# Altium PCB Displaying_Unit_Pcb.PcbDoc
Units mm, origin at the board's own origin, x right, y up, seen from the top; angles counter-clockwise.
Board outline 178.44 x 153.42 mm, 2 copper layers (Top Layer, Bottom Layer); 73 components, 81 nets, 257 pads, 30 vias.
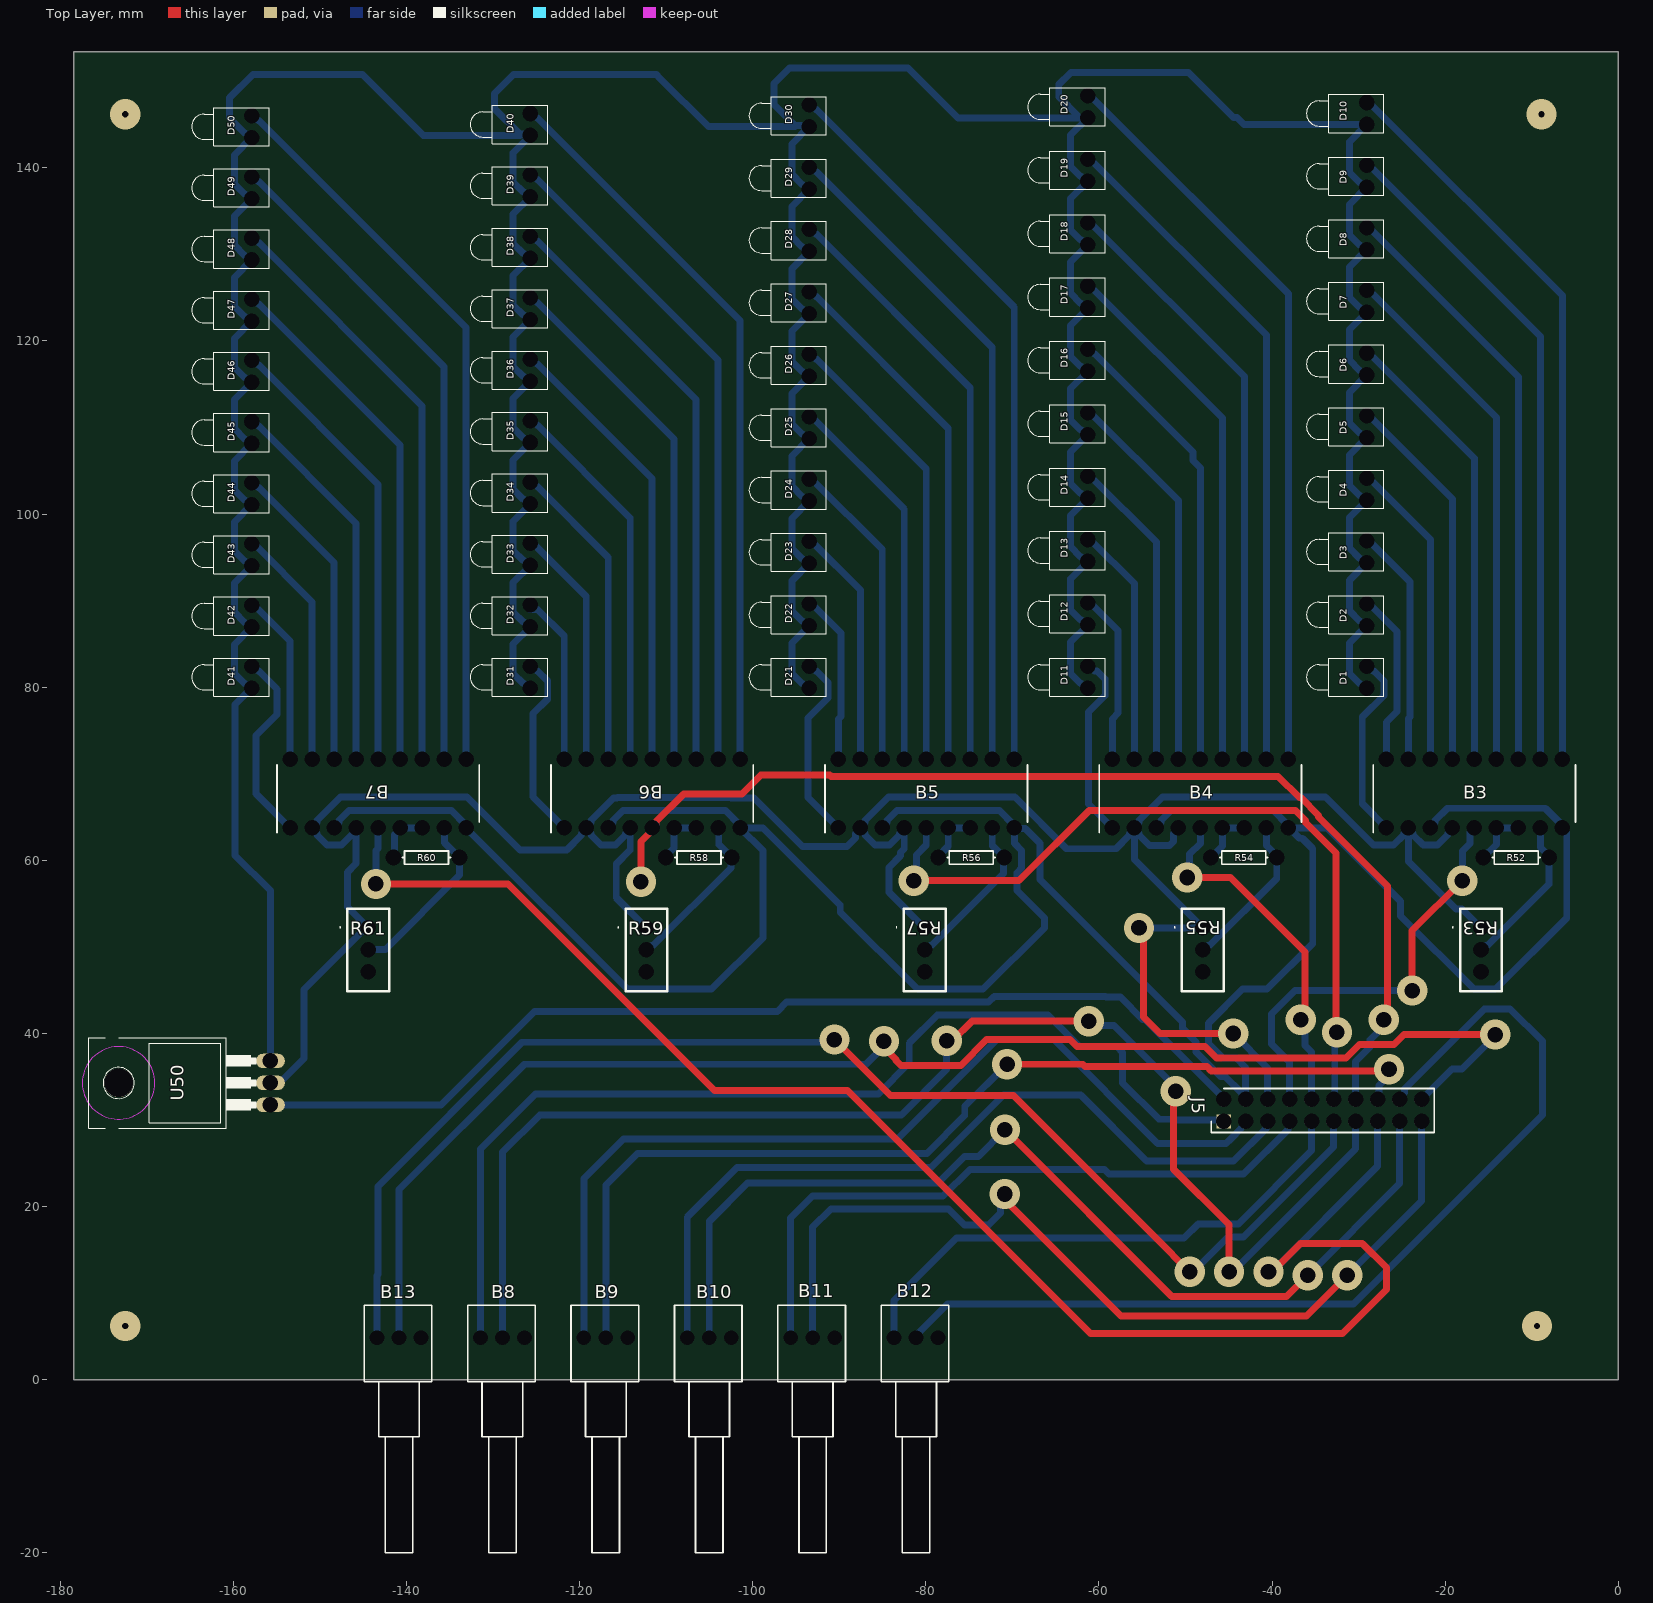
[diagram p0: Top Layer view]
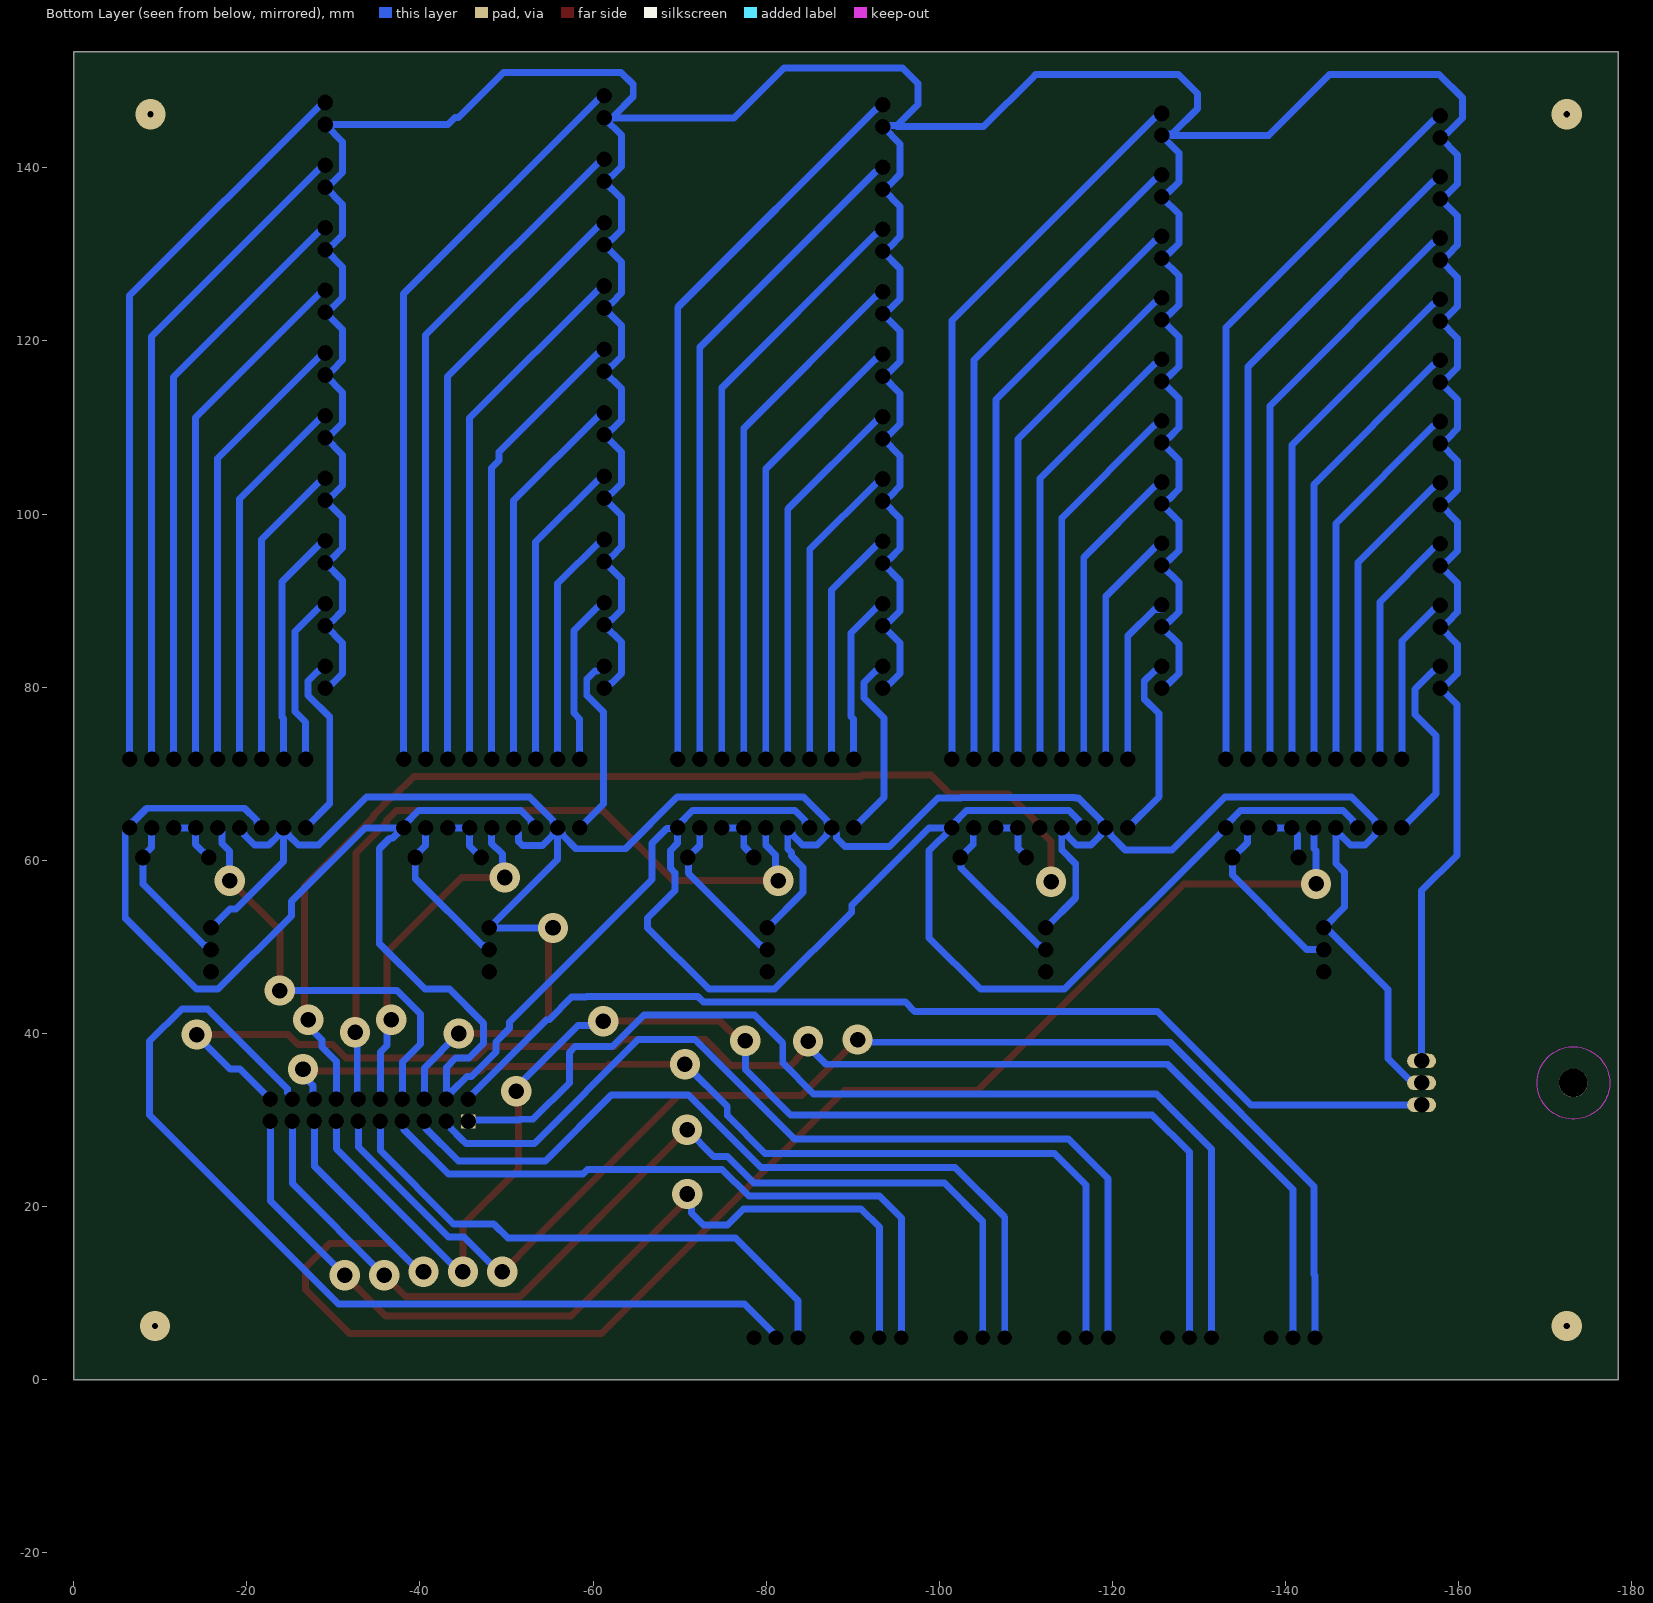
[diagram p1: Bottom Layer view, seen from below]

## Layer stack, top to bottom
Top Solder: solder mask 0.0102, Solder Resist, Dk 3.5
Top Layer: signal copper 0.0356
Dielectric 1: dielectric 0.32, FR-4, Dk 4.8
Bottom Layer: signal copper 0.0356
Bottom Solder: solder mask 0.0102, Solder Resist, Dk 3.5

## Board outline
-178.435,0 0,0 0,153.416 -105.537,153.416 -178.435,153.416

## Design rules (kind name [scope] priority, off if disabled: settings)
Clearance [All] p1: gap=0.7 ignorepadtopadclearanceinfootprint=FALSE except(0: Arc-Hole Track-Hole SMDPad-Hole THPad-Hole Via-Hole Fill-Hole Poly-Hole Region-Hole Text-Hole)
PolygonConnect [All] p1: connectstyle=Relief reliefconductorwidth=0.254 reliefentries=4 polygonreliefangle="90 Angle" airgapwidth=0.254
RoutingVias [All] p1: holewidth=0.711 width=1.27 viastyle="Through Hole" minholewidth=0.711 minwidth=1.27 maxholewidth=0.711 maxwidth=1.27
SolderMaskExpansion [All] p1: expansion=0.102 istentingtop=FALSE
Width [All] p1: maxlimit=0.8 minlimit=0.8 preferedwidth=0.8 minimp=50.000000 maximp=50.000000 favimp=50.000000
30 further rules are at their usual default settings.

## Components (designator, comment, footprint, x,y, rotation, side; value= is the part's Value field where it differs from the comment)
B3 "LM3915N-1_NOPB" DIP794W56P254L2286H533Q18N -16.637,67.723 r90 top
B4 "LM3915N-1_NOPB" DIP794W56P254L2286H533Q18N -48.292,67.723 r90 top
B5 "LM3915N-1_NOPB" DIP794W56P254L2286H533Q18N -79.947,67.723 r90 top
B6 "LM3915N-1_NOPB" DIP794W56P254L2286H533Q18N -111.601,67.723 r90 top
B7 "LM3915N-1_NOPB" DIP794W56P254L2286H533Q18N -143.256,67.723 r90 top
B8 "14910A0BHSX10502KA" 14910F0GJSX10103KA -128.9,-6.571 r270 top
B9 "14910A0BHSX10502KA" 14910F0GJSX10103KA -116.957,-6.571 r270 top
B10 "14910A0BHSX10502KA" 14910F0GJSX10103KA -105.014,-6.571 r270 top
B11 "14910A0BHSX10502KA" 14910F0GJSX10103KA -93.071,-6.571 r270 top
B12 "14910A0BHSX10502KA" 14910F0GJSX10103KA -81.128,-6.571 r270 top
B13 "14910A0BHSX10502KA" 14910F0GJSX10103KA -140.843,-6.571 r270 top
D1 "LED1" LED-1 -29.083,81.153 r180 top
D2 "LED1" LED-1 -29.083,88.388 r180 top
D3 "LED1" LED-1 -29.083,95.623 r180 top
D4 "LED1" LED-1 -29.083,102.858 r180 top
D5 "LED1" LED-1 -29.083,110.093 r180 top
D6 "LED1" LED-1 -29.083,117.327 r180 top
D7 "LED1" LED-1 -29.083,124.562 r180 top
D8 "LED1" LED-1 -29.083,131.797 r180 top
D9 "LED1" LED-1 -29.083,139.032 r180 top
D10 "LED1" LED-1 -29.083,146.267 r180 top
D11 "LED1" LED-1 -61.277,81.153 r180 top
D12 "LED1" LED-1 -61.277,88.473 r180 top
D13 "LED1" LED-1 -61.277,95.792 r180 top
D14 "LED1" LED-1 -61.277,103.112 r180 top
D15 "LED1" LED-1 -61.277,110.431 r180 top
D16 "LED1" LED-1 -61.277,117.751 r180 top
D17 "LED1" LED-1 -61.277,125.07 r180 top
D18 "LED1" LED-1 -61.277,132.39 r180 top
D19 "LED1" LED-1 -61.277,139.709 r180 top
D20 "LED1" LED-1 -61.277,147.029 r180 top
D21 "LED1" LED-1 -93.472,81.153 r180 top
D22 "LED1" LED-1 -93.472,88.36 r180 top
D23 "LED1" LED-1 -93.472,95.566 r180 top
D24 "LED1" LED-1 -93.472,102.773 r180 top
D25 "LED1" LED-1 -93.472,109.98 r180 top
D26 "LED1" LED-1 -93.472,117.186 r180 top
D27 "LED1" LED-1 -93.472,124.393 r180 top
D28 "LED1" LED-1 -93.472,131.6 r180 top
D29 "LED1" LED-1 -93.472,138.806 r180 top
D30 "LED1" LED-1 -93.472,146.013 r180 top
D31 "LED1" LED-1 -125.666,81.153 r180 top
D32 "LED1" LED-1 -125.666,88.247 r180 top
D33 "LED1" LED-1 -125.666,95.341 r180 top
D34 "LED1" LED-1 -125.666,102.434 r180 top
D35 "LED1" LED-1 -125.666,109.528 r180 top
D36 "LED1" LED-1 -125.666,116.622 r180 top
D37 "LED1" LED-1 -125.666,123.716 r180 top
D38 "LED1" LED-1 -125.666,130.809 r180 top
D39 "LED1" LED-1 -125.666,137.903 r180 top
D40 "LED1" LED-1 -125.666,144.997 r180 top
D41 "LED1" LED-1 -157.861,81.153 r180 top
D42 "LED1" LED-1 -157.861,88.219 r180 top
D43 "LED1" LED-1 -157.861,95.284 r180 top
D44 "LED1" LED-1 -157.861,102.35 r180 top
D45 "LED1" LED-1 -157.861,109.415 r180 top
D46 "LED1" LED-1 -157.861,116.481 r180 top
D47 "LED1" LED-1 -157.861,123.546 r180 top
D48 "LED1" LED-1 -157.861,130.612 r180 top
D49 "LED1" LED-1 -157.861,137.677 r180 top
D50 "LED1" LED-1 -157.861,144.743 r180 top
J5 "M20-9761042" HDRV20W64P254_2X10_2540X508X838P -45.593,29.845 r0 top
R52 "Res1" AXIAL-0.3 -11.811,60.325 r180 top value=1K
R53 "3296W-1-501LF" 3296W1501LF -15.875,52.197 r180 top
R54 "Res1" AXIAL-0.3 -43.275,60.325 r180 top value=1K
R55 "3296W-1-501LF" 3296W1501LF -48.006,52.197 r180 top
R56 "Res1" AXIAL-0.3 -74.74,60.325 r180 top value=1K
R57 "3296W-1-501LF" 3296W1501LF -80.137,52.197 r180 top
R58 "Res1" AXIAL-0.3 -106.204,60.325 r180 top value=1K
R59 "3296W-1-501LF" 3296W1501LF -112.268,52.197 r180 top
R60 "Res1" AXIAL-0.3 -137.668,60.325 r180 top value=1K
R61 "3296W-1-501LF" 3296W1501LF -144.399,52.197 r180 top
U50 "LM7805" TO220 -162.052,34.29 r90 top

## Footprints (in the part's own frame and the unit in brackets; to place one, negate y for a bottom-side part, rotate by r counter-clockwise, add the part's x,y. Pads: shape width x height; smd on the part's side, far side on the other; paste and mask are expansions set on the pad)
3296W1501LF [mm]
  round 1.217 hole 1.8: 1(0,0) 2(0,2.54) 3(0,5.08)
  silkscreen extent -2.42,-2.22 3.3,7.3, body extent -10,-3.38 10,3.38, height 5.8
14910F0GJSX10103KA [mm]
  round 1.37 hole 1.7: 1(-11.42,-2.54) 2(-11.42,0) 3(-11.42,2.54)
  silkscreen extent -15.18,-4.02 13.39,3.79, body extent -10,-3.38 10,3.38, height 5.8
AXIAL-0.3 [mm] "Axial Device, Thru-Hole; 2 Leads; 0.3 in Pin Spacing"
  round 1.4 hole 1.8: 1(-3.81,0) 2(3.81,0)
  silkscreen extent -2.77,-0.76 2.77,0.76
DIP794W56P254L2286H533Q18N [mm]
  rect 1.159x1.159 / inner round 1.159 / far side rect 1.159x1.159 hole 1.8: 1(-3.969,10.16)
  round 1.159 hole 1.8: 2(-3.969,7.62) 3(-3.969,5.08) 4(-3.969,2.54) 5(-3.969,0) 6(-3.969,-2.54) 7(-3.969,-5.08) 8(-3.969,-7.62) 9(-3.969,-10.16) 10(3.969,-10.16) 11(3.969,-7.62) 12(3.969,-5.08) 13(3.969,-2.54) 14(3.969,0) 15(3.969,2.54) 16(3.969,5.08) 17(3.969,7.62) 18(3.969,10.16)
  silkscreen extent -4.55,-11.68 3.3,11.68
HDRV20W64P254_2X10_2540X508X838P [mm]
  rect 1.65x1.65 / inner round 1.65 / far side rect 1.65x1.65 hole 1.8: 1(0,0)
  round 1.65 hole 1.8: 2(0,2.54) 3(2.54,0) 4(2.54,2.54) 5(5.08,0) 6(5.08,2.54) 7(7.62,0) 8(7.62,2.54) 9(10.16,0) 10(10.16,2.54) 11(12.7,0) 12(12.7,2.54) 13(15.24,0) 14(15.24,2.54) 15(17.78,0) 16(17.78,2.54) 17(20.32,0) 18(20.32,2.54) 19(22.86,0) 20(22.86,2.54)
  silkscreen extent -1.45,-1.27 24.31,3.81, body extent -1.27,-1.27 24.13,3.81, height 8.38
LED-1 [mm] "LED; 2 Leads"
  round 1.6 hole 1.8: 1(0,1.27) 2(0,-1.27)
  silkscreen extent -2,-2.2 6.95,2.2
TO220 [mil]
  oval 66x132 hole 70.87: 1(-100,-250) 2(0,-250) 3(100,-250)
  round 130 hole 130 unplated: ""(0,440)
  Keep-Out Layer circle w0: c0,440 r165
  Keep-Out Layer circle w0: c0,440 r165
  silkscreen extent -205,-185 205,575

## Part data
B3 B4 B5 B6 B7: "Logarithmic bargraph driver,LM3915N-1 Texas Instruments LM3915N-1/NOPB, LED Driver, 10-Digits 10-Segments, 3.3 V, 5 V, 9 V, 12 V, 15 V, 18 V, 24 V, 18-Pin", Manufacturer_Name="Texas Instruments", Manufacturer_Part_Number=LM3915N-1/NOPB, Mouser Part Number=926-LM3915N-1/NOPB, Datasheet Link=http://media.digikey.com/pdf/Data%20Sheets/Texas%20Instruments%20PDFs/LM3915.pdf, Geometry.Height=5.334mm, Mouser Price/Stock=https://www.mouser.co.uk/ProductDetail/Texas-Instruments/LM3915N-1-NOPB?qs=QbsRYf82W3Fo14xSwohWxQ%3D%3D
B8 B9 B10 B11 B12 B13: "Potentiometers 1/2' SQ 1/4'S 5Kohms Cermet", Manufacturer_Name=Vishay, Mouser Part Number=594-14910A0BHSP502KA, Datasheet Link=https://www.mouser.com/datasheet/2/427/148149-239924.pdf, Manufacturer_Part_Number=14910A0BHSX10502KA, Mouser Price/Stock=https://www.mouser.co.uk/ProductDetail/Vishay-Spectrol/14910A0BHSX10502KA?qs=sKxHajcpPaBuEjDBnLxOZg%3D%3D
D1 D2 D3 D4 D5 D6 D7 D8 D9 D10 D11 D12 D13 D14 D15 D16 D17 D18 D19 D20 D21 D22 D23 D24 D25 D26 D27 D28 D29 D30 D31 D32 D33 D34 D35 D36 D37 D38 D39 D40 D41 D42 D43 D44 D45 D46 D47 D48 D49 D50: "Typical RED GaAs LED", LatestRevisionDate=08-Jul-2005, LatestRevisionNote="Mech Layer 1 removed.", PackageDescription="LED; 2 Leads", PackageReference=LED-1, Published=8-Jun-2000, Publisher="Altium Limited"
J5: "Headers & Wire Housings 10+10 DIL VERTICAL PIN HEADER GOLD+TIN", Manufacturer_Name=Harwin, Mouser Part Number=855-M20-9761042, Datasheet Link=https://cdn.harwin.com/pdfs/M20-976.pdf, Geometry.Height=8.38mm, Manufacturer_Part_Number=M20-9761042, Mouser Price/Stock=https://www.mouser.co.uk/ProductDetail/Harwin/M20-9761042?qs=vF78I%252BjhbY%2Fp44UYNx369Q%3D%3D
R52 R54 R56 R58 R60: "Resistor", LatestRevisionDate=17-Jul-2002, LatestRevisionNote="Re-released for DXP Platform.", PackageDescription="Axial Device, Thru-Hole; 2 Leads; 0.3 in Pin Spacing", PackageReference=AXIAL-0.3, Published=8-Jun-2000, Publisher="Altium Limited"
R53 R55 R57 R59 R61: "Trimmer Resistors - Through Hole 3/8IN 500 OHM Sealed Vertical Adjust", Manufacturer_Name=Bourns, Mouser Part Number=652-3296W-1-501LF, Arrow Part Number=3296W-1-501LF, Arrow Price/Stock=https://www.arrow.com/en/products/3296w-1-501lf/bourns?region=europe, Datasheet Link=https://datasheet.datasheetarchive.com/originals/dk/DKDS-12/224533.pdf, Geometry.Height=11.8mm, Manufacturer_Part_Number=3296W-1-501LF, Mouser Price/Stock=https://www.mouser.co.uk/ProductDetail/Bourns/3296W-1-501LF?qs=jv1NtkgVBglZfwkzTzmOUg%3D%3D
U50: "Linear Voltage Regulator IC Positive Fixed 1 Output 1.5A DDPAK/TO-263-3", Package=None, Availability="In Stock", Check_prices=https://www.snapeda.com/parts/LM7805/Texas+Instruments/view-part/?ref=eda, MF="Texas Instruments", MP=LM7805, Price=None, Purchase-URL=https://pricing.snapeda.com/search/part/LM7805/?ref=eda, SnapEDA_Link=https://www.snapeda.com/parts/LM7805/Texas+Instruments/view-part/?ref=snap

## Via types
v1: diameter 3.5, hole 1.8, Top Layer to Bottom Layer, 26 vias
v2: diameter 3.5, hole 0.711, Top Layer to Bottom Layer, 4 vias

## Nets (pads, with @x,y where several pads share a name; then routed paths per layer and width w, separated by ;. In a path a pad name is that pad's centre, name@x,y a point inside that pad or via, vN(x,y) a via of type N, cw(c..) or ccw(c..) an arc to the next point about the centre after c; other vN are vias at no path point)
B1L1: B3.1 D1.2 | length 21.9
  Bottom Layer w0.8: D1.2 -28.867,82.423 -28.327,81.883 -28.255,81.883 -27.083,80.711 -27.083,79.055 -29.591,76.547 -29.591,66.548 B3.1
B1L2: B3.18 D2.2 | length 20.1
  Bottom Layer w0.8: D2.2 -28.93,89.505 -28.641,89.505 -25.583,86.446 -25.583,77.168 -26.797,75.954 B3.18
B1L3: B3.17 D3.2 | length 27.5
  Bottom Layer w0.8: D3.2 -28.93,96.74 -28.641,96.74 -24.083,92.181 -24.083,76.547 -24.257,76.373 B3.17
B1L4: B3.16 D4.2 | length 35.7
  Bottom Layer w0.8: D4.2 -28.93,103.975 -28.641,103.975 -21.717,97.05 B3.16
B1L5: B3.15 D5.2 | length 43.9
  Bottom Layer w0.8: D5.2 -28.93,111.209 -28.641,111.209 -19.177,101.745 B3.15
B1L6: B3.14 D6.2 | length 52.2
  Bottom Layer w0.8: D6.2 -28.93,118.444 -28.641,118.444 -16.637,106.44 B3.14
B1L7: B3.13 D7.2 | length 60.5
  Bottom Layer w0.8: D7.2 -28.93,125.679 -28.641,125.679 -14.097,111.135 B3.13
B1L8: B3.12 D8.2 | length 68.8
  Bottom Layer w0.8: D8.2 -28.93,132.914 -28.641,132.914 -11.557,115.83 B3.12
B1L9: B3.11 D9.2 | length 77.1
  Bottom Layer w0.8: D9.2 -28.93,140.149 -28.641,140.149 -9.017,120.524 B3.11
B1L10: B3.10 D10.2 | length 85.4
  Bottom Layer w0.8: D10.2 -28.93,147.384 -28.641,147.384 -6.477,125.219 B3.10
B2L1: B4.1 D11.2 | length 21.7
  Bottom Layer w0.8: D11.2 -61.061,82.423 -60.521,81.883 -60.222,81.883 -59.278,80.938 -59.278,79.055 -61.214,77.118 -61.214,66.516 B4.1
B2L2: B4.18 D12.2 | length 19.9
  Bottom Layer w0.8: D12.2 -61.124,89.589 -60.836,89.589 -57.778,86.531 -57.778,77.012 -58.452,76.337 B4.18
B2L3: B4.17 D13.2 | length 27.8
  Bottom Layer w0.8: D13.2 -61.124,96.909 -60.836,96.909 -55.912,91.985 B4.17
B2L4: B4.16 D14.2 | length 36.1
  Bottom Layer w0.8: D14.2 -61.124,104.229 -60.836,104.229 -53.372,96.764 B4.16
B2L5: B4.15 D15.2 | length 44.5
  Bottom Layer w0.8: D15.2 -61.124,111.548 -60.836,111.548 -50.832,101.544 B4.15
B2L6: B4.14 D16.2 | length 52.9
  Bottom Layer w0.8: D16.2 -61.061,119.021 -60.521,118.481 -60.449,118.481 -49.149,107.181 -49.149,106.172 -48.292,105.315 B4.14
B2L7: B4.13 D17.2 | length 61.2
  Bottom Layer w0.8: D17.2 -61.124,126.187 -60.836,126.187 -45.752,111.103 B4.13
B2L8: B4.12 D18.2 | length 69.6
  Bottom Layer w0.8: D18.2 -61.124,133.507 -60.836,133.507 -43.212,115.883 B4.12
B2L9: B4.11 D19.2 | length 78
  Bottom Layer w0.8: D19.2 -61.124,140.826 -60.836,140.826 -40.672,120.662 B4.11
B2L10: B4.10 D20.2 | length 86.4
  Bottom Layer w0.8: D20.2 -61.124,148.146 -60.836,148.146 -38.132,125.442 B4.10
B3L1: B5.1 D21.2 | length 22.1
  Bottom Layer w0.8: D21.2 -93.256,82.423 -92.716,81.883 -92.644,81.883 -91.313,80.552 -91.313,78.74 -93.599,76.454 -93.599,67.246 B5.1
B3L2: B5.18 D22.2 | length 19.7
  Bottom Layer w0.8: D22.2 -93.319,89.477 -93.03,89.477 -89.813,86.259 -89.813,76.628 -90.106,76.335 B5.18
B3L3: B5.17 D23.2 | length 27.8
  Bottom Layer w0.8: D23.2 -93.319,96.683 -93.03,96.683 -87.566,91.219 B5.17
B3L4: B5.16 D24.2 | length 36
  Bottom Layer w0.8: D24.2 -93.319,103.89 -93.03,103.89 -85.026,95.886 B5.16
B3L5: B5.15 D25.2 | length 44.3
  Bottom Layer w0.8: D25.2 -93.319,111.097 -93.03,111.097 -82.486,100.553 B5.15
B3L6: B5.14 D26.2 | length 52.5
  Bottom Layer w0.8: D26.2 -93.256,118.456 -92.716,117.916 -92.644,117.916 -79.947,105.219 B5.14
B3L7: B5.13 D27.2 | length 60.8
  Bottom Layer w0.8: D27.2 -93.256,125.663 -92.716,125.123 -92.644,125.123 -77.406,109.886 B5.13
B3L8: B5.12 D28.2 | length 69.1
  Bottom Layer w0.8: D28.2 -93.256,132.87 -92.716,132.33 -92.644,132.33 -74.867,114.553 B5.12
B3L9: B5.11 D29.2 | length 77.3
  Bottom Layer w0.8: D29.2 -93.256,140.076 -92.716,139.536 -92.644,139.536 -72.326,119.219 B5.11
B3L10: B5.10 D30.2 | length 85.6
  Bottom Layer w0.8: D30.2 -93.256,147.283 -92.716,146.743 -92.644,146.743 -69.787,123.886 B5.10
B4L1: B6.1 D31.2 | length 21.8
  Bottom Layer w0.8: D31.2 -125.45,82.423 -124.91,81.883 -124.838,81.883 -123.667,80.711 -123.667,78.644 -125.349,76.962 -125.349,67.342 B6.1
B4L2: B6.18 D32.2 | length 19.5
  Bottom Layer w0.8: D32.2@-125.73,88.977 -124.838,88.977 -121.761,85.9 B6.18
B4L3: B6.17 D33.2 | length 27.8
  Bottom Layer w0.8: D33.2 -125.513,96.457 -125.225,96.457 -119.221,90.454 B6.17
B4L4: B6.16 D34.2 | length 35.9
  Bottom Layer w0.8: D34.2 -125.45,103.704 -124.91,103.164 -124.838,103.164 -116.681,95.007 B6.16
B4L5: B6.15 D35.2 | length 44
  Bottom Layer w0.8: D35.2 -125.45,110.798 -124.91,110.258 -124.838,110.258 -114.141,99.561 B6.15
B4L6: B6.14 D36.2 | length 52.2
  Bottom Layer w0.8: D36.2 -125.45,117.892 -124.91,117.352 -124.838,117.352 -111.601,104.115 B6.14
B4L7: B6.13 D37.2 | length 60.3
  Bottom Layer w0.8: D37.2 -125.45,124.986 -124.91,124.446 -124.838,124.446 -109.061,108.669 B6.13
B4L8: B6.12 D38.2 | length 68.5
  Bottom Layer w0.8: D38.2 -125.45,132.079 -124.91,131.539 -124.838,131.539 -106.521,113.223 B6.12
B4L9: B6.11 D39.2 | length 76.6
  Bottom Layer w0.8: D39.2 -125.45,139.173 -124.91,138.633 -124.838,138.633 -103.981,117.776 B6.11
B4L10: B6.10 D40.2 | length 84.8
  Bottom Layer w0.8: D40.2 -125.45,146.267 -124.91,145.727 -124.838,145.727 -101.441,122.33 B6.10
B5L1: B7.1 D41.2 | length 22.7
  Bottom Layer w0.8: D41.2 -157.645,82.423 -157.105,81.883 -157.033,81.883 -154.916,79.766 -154.916,76.843 -157.353,74.406 -157.353,67.691 B7.1
B5L2: B7.18 D42.2 | length 19.8
  Bottom Layer w0.8: D42.2 -157.708,89.335 -157.419,89.335 -153.416,85.332 B7.18
B5L3: B7.17 D43.2 | length 27.9
  Bottom Layer w0.8: D43.2 -157.708,96.401 -157.419,96.401 -150.876,89.858 B7.17
B5L4: B7.16 D44.2 | length 36
  Bottom Layer w0.8: D44.2 -157.645,103.62 -157.105,103.08 -157.033,103.08 -148.336,94.383 B7.16
B5L5: B7.15 D45.2 | length 44.2
  Bottom Layer w0.8: D45.2 -157.645,110.685 -157.105,110.145 -157.033,110.145 -145.796,98.909 B7.15
B5L6: B7.14 D46.2 | length 52.3
  Bottom Layer w0.8: D46.2 -157.645,117.751 -157.105,117.211 -157.033,117.211 -143.256,103.434 B7.14
B5L7: B7.13 D47.2 | length 60.4
  Bottom Layer w0.8: D47.2 -157.645,124.816 -157.105,124.276 -157.033,124.276 -140.716,107.96 B7.13
B5L8: B7.12 D48.2 | length 68.5
  Bottom Layer w0.8: D48.2 -157.645,131.882 -157.105,131.342 -157.033,131.342 -138.176,112.485 B7.12
B5L9: B7.11 D49.2 | length 76.6
  Bottom Layer w0.8: D49.2 -157.645,138.947 -157.105,138.407 -157.033,138.407 -135.636,117.011 B7.11
B5L10: B7.10 D50.2 | length 84.7
  Bottom Layer w0.8: D50.2 -157.645,146.013 -157.105,145.473 -157.033,145.473 -133.096,121.536 B7.10
GND: B3.2 B3.4 B4.2 B4.4 B5.2 B5.4 B6.2 B6.4 B7.2 B7.4 J5.6 R53.1 R55.1 R57.1 R59.1 R61.1 U50.2 | length 315.1
  Top Layer w0.8: v1(-55.372,52.197) -54.855,51.68 -54.855,41.901 -52.959,40.005 v1(-44.483,40.005)
  Bottom Layer w0.8: U50.2 -154.663,34.29 -151.821,37.132 -151.821,45.064 -144.767,52.117 -144.479,52.117 R61.1 -146.812,54.61 -146.812,58.625 -145.796,59.641 B7.4 -145.865,63.685 -145.865,63.397 -147.508,61.754 -149.164,61.754 -150.336,62.926 -150.336,63.117 -150.876,63.657 B7.2 -150.876,63.851 -150.336,64.391 -150.336,64.582 -147.608,67.31 -132.969,67.31 -126.873,61.214 -121.473,61.214 -119.761,62.926 -119.761,63.117 B6.2@-119.221,63.657 ; B6.4 B6.4@-114.141,63.657 ; R59.1 -115.753,55.682 -115.753,59.58 -114.141,61.191 B6.4@-114.141,63.657 ; B5.4 B5.4@-82.486,63.657 ; R57.1 -84.257,56.317 -84.257,59.182 -82.907,60.532 -82.907,60.924 -82.486,61.344 B5.4@-82.486,63.657 ; v1(-55.372,52.197) R55.1 -55.912,60.103 B4.2@-55.912,63.657 ; B4.4 -50.832,63.657 -51.372,63.117 -51.372,62.191 -51.84,61.722 -54.168,61.722 -55.372,62.926 -55.372,63.117 B4.2@-55.912,63.657 ; v1(-44.483,40.005) -40.513,36.035 J5.6 ; B3.2 B3.2@-24.257,63.657 ; B3.4 -19.177,63.657 -19.717,63.117 -19.717,62.926 -20.889,61.754 -22.545,61.754 -23.717,62.926 -23.717,63.117 B3.2@-24.257,63.657 ; R53.1 -18.055,54.377 -18.784,54.377 -24.257,59.85 B3.2@-24.257,63.657 ; B6.2@-119.221,63.657 -118.681,63.117 -118.681,62.926 -117.51,61.754 -115.853,61.754 -114.681,62.926 -114.681,63.117 B6.4@-114.141,63.657 ; B6.2@-119.221,63.657 B6.2 -119.221,63.851 -118.681,64.391 -118.681,64.582 -116.081,67.183 -115.662,67.183 -115.591,67.254 -102.532,67.254 -102.475,67.197 -99.836,67.197 -94.234,61.595 -89.115,61.595 -88.106,62.603 -88.106,63.117 B5.2@-87.566,63.657 ; B5.2@-87.566,63.657 B5.2 -87.566,63.851 -87.027,64.391 -87.027,64.582 -84.299,67.31 -69.723,67.31 -63.754,61.341 -58.036,61.341 -56.452,62.926 -56.452,63.117 B4.2@-55.912,63.657 ; B5.2@-87.566,63.657 -87.027,63.117 -87.027,62.926 -85.855,61.754 -84.198,61.754 -83.026,62.926 -83.026,63.117 B5.4@-82.486,63.657 ; B4.2@-55.912,63.657 B4.2 -55.912,63.851 -55.372,64.391 -55.372,64.582 -52.644,67.31 -33.86,67.31 -28.304,61.754 -25.969,61.754 -24.797,62.926 -24.797,63.117 B3.2@-24.257,63.657
NetB3_6: B3.6 B3.7 R52.2 | length 6.6
  Bottom Layer w0.8: R52.2 -14.097,61.849 B3.6 B3.7
NetB3_8: B3.8 R52.1 R53.2 | length 17.9
  Bottom Layer w0.8: R53.2 -15.762,49.657 -15.222,50.197 -15.047,50.197 -8.001,57.243 -8.001,60.487 -9.017,61.503 B3.8
NetB4_6: B4.6 B4.7 R54.2 | length 6.5
  Bottom Layer w0.8: R54.2 -47.085,60.345 -45.752,61.679 B4.6 B4.7
NetB4_8: B4.8 R54.1 R55.2 | length 18.3
  Bottom Layer w0.8: R55.2 -47.893,49.657 -47.353,50.197 -47.178,50.197 -39.465,57.909 -39.465,60.487 -40.672,61.694 B4.8
NetB5_6: B5.6 B5.7 R56.2 | length 6.4
  Bottom Layer w0.8: R56.2 -78.55,60.487 -77.406,61.63 B5.6 B5.7
NetB5_8: B5.8 R56.1 R57.2 | length 18.7
  Bottom Layer w0.8: R57.2 -80.024,49.657 -79.484,50.197 -79.309,50.197 -71.044,58.461 -71.044,60.21 R56.1 -72.326,61.722 B5.8
NetB6_6: B6.6 B6.7 R58.2 | length 6.4
  Bottom Layer w0.8: R58.2 -110.014,60.487 -109.061,61.44 B6.6 B6.7
NetB6_8: B6.8 R58.1 R59.2 | length 19
  Bottom Layer w0.8: R59.2 -112.155,49.657 -111.615,50.197 -111.44,50.197 -102.509,59.128 -102.509,60.21 R58.1 -103.913,61.844 -103.913,63.685 B6.8
NetB7_6: B7.6 B7.7 R60.2 | length 6.3
  Bottom Layer w0.8: R60.2 -141.363,60.44 -141.363,63.01 -140.716,63.657 B7.6 B7.7
NetB7_8: B7.8 R60.1 R61.2 | length 20.3
  Bottom Layer w0.8: R61.2 -144.333,49.723 -142.428,49.723 -133.858,58.293 R60.1 -135.567,62.034 -135.567,63.685 B7.8
out1: B3.5 J5.8 | length 49.9
  Top Layer w0.8: v1(-23.82,44.958) -23.82,51.872 v1(-18.034,57.658)
  Bottom Layer w0.8: J5.8 -37.973,36.703 -40.061,38.791 -40.061,42.258 -37.361,44.958 v1(-23.82,44.958) ; v1(-18.034,57.658) -18.034,61.06 -17.145,61.949 -17.145,63.285 -16.676,63.754 B3.5
out2: B4.5 J5.10 | length 41.3
  Top Layer w0.8: v1(-49.801,58.022) -44.814,58.022 -36.186,49.394 -36.186,42.102 v1(-36.703,41.585)
  Bottom Layer w0.8: v1(-49.801,58.022) -49.521,58.302 -49.521,60.73 -48.292,61.959 B4.5 ; v1(-36.703,41.585) -36.191,41.073 -36.191,38.635 -35.433,37.877 J5.10
out3: B5.5 J5.12 | length 89.7
  Top Layer w0.8: v1(-81.407,57.658) -69.215,57.658 -61.119,65.754 -37.303,65.754 -36.132,64.582 -36.132,64.363 -32.639,60.871 -32.639,40.268 v1(-32.511,40.14)
  Bottom Layer w0.8: v1(-81.407,57.658) -81.095,57.97 -81.095,60.608 -79.947,61.756 B5.5 ; J5.12 -32.766,32.512 -32.766,39.885 v1(-32.511,40.14)
out4: B6.5 J5.14 | length 126
  Top Layer w0.8: v1(-112.903,57.531) -112.903,62.164 -111.457,63.61 -111.138,63.929 -111.138,64.506 -107.959,67.685 -101.225,67.685 -99.06,69.85 -91.093,69.85 -90.935,69.692 -39.3,69.692 -36.862,67.254 -36.682,67.254 -34.632,65.204 -34.632,64.985 -26.67,57.023 -26.67,42.008 v1(-27.093,41.585)
  Bottom Layer w0.8: J5.14 -30.353,36.745 -28.672,38.426 -28.672,39.276 -27.093,40.854 v1(-27.093,41.585)
out5: B7.5 J5.15 | length 188.4
  Top Layer w0.8: v1(-143.51,57.277) -128.27,57.277 -104.394,33.401 -89.027,33.401 -60.96,5.334 -31.877,5.334 -26.797,10.414 -26.797,12.954 -29.591,15.748 -36.735,15.748 -40.005,12.478 v1(-40.418,12.478)
  Bottom Layer w0.8: v1(-143.51,57.277) -143.51,61.121 -143.256,61.375 B7.5 ; v1(-40.418,12.478) -40.005,12.478 -27.813,24.67 J5.15
Raw_V_POS: J5.2 U50.1 | length 120.3
  Bottom Layer w0.8: U50.1 -135.979,31.75 -125.184,42.545 -97.155,42.545 -96.083,43.617 -72.753,43.617 -72.094,44.276 -59.262,44.276 -59.182,44.196 -57.531,44.196 -54.92,41.585 -54.633,41.585 -45.593,32.545 J5.2
V_POS: B3.3 B3.9 B4.3 B4.9 B5.3 B5.9 B6.3 B6.9 B7.3 B7.9 J5.4 | length 344.4
  Bottom Layer w0.8: B7.3 -148.336,63.851 -147.796,64.391 -147.796,64.582 -146.624,65.754 -134.808,65.754 -133.165,64.111 -133.165,63.823 B7.9 -114.459,45.117 -104.743,45.117 -98.806,51.054 -98.806,61.119 B6.9 ; B6.3 -116.681,63.851 -116.141,64.391 -116.141,64.582 -114.97,65.754 -103.153,65.754 -101.51,64.111 -101.51,63.823 B6.9 ; B5.3 -85.026,63.851 -84.487,64.391 -84.487,64.582 -83.315,65.754 -71.498,65.754 -69.855,64.111 -69.855,63.823 B5.9 B5.9@-69.751,63.718 ; B4.3 -53.372,63.851 -52.832,64.391 -52.832,64.582 -51.66,65.754 -39.843,65.754 -38.2,64.111 -38.2,63.823 B4.9 B4.9@-38.035,63.754 ; J5.4 J5.4@-43.053,32.615 ; B3.3 -21.717,63.851 -21.177,64.391 -21.177,64.582 -19.743,66.016 -8.451,66.016 -6.546,64.111 -6.546,63.823 B3.9 -6.477,63.657 -5.969,63.149 -5.969,53.34 -14.192,45.117 -16.703,45.117 -25.179,53.593 -25.179,55.278 -33.655,63.754 B4.9@-38.035,63.754 ; B6.9 -98.806,63.754 -89.886,54.834 -89.886,54.037 -80.965,45.117 -73.374,45.117 -66.294,52.197 -66.294,53.34 -69.469,56.515 -69.469,58.564 -68.93,59.104 -68.93,61.153 -69.751,61.974 B5.9@-69.751,63.718 ; B5.9@-69.751,63.718 -69.718,63.685 -68.511,63.685 -66.802,61.976 -66.802,57.785 -50.355,41.338 -50.355,40.608 -48.768,39.02 -48.768,37.842 -45.978,35.052 -45.432,35.052 -43.593,33.213 -43.593,33.155 J5.4@-43.053,32.615 ; J5.4@-43.053,32.615 -43.053,36.068 -44.14,37.155 -45.664,37.155 -47.333,38.824 -47.333,41.186 -43.402,45.117 -40.608,45.117 -35.306,50.419 -35.306,61.341 -36.519,62.554 -36.835,62.554 B4.9@-38.035,63.754
V_POS_LED: D1.1 D2.1 D3.1 D4.1 D5.1 D6.1 D7.1 D8.1 D9.1 D10.1 D11.1 D12.1 D13.1 D14.1 D15.1 D16.1 D17.1 D18.1 D19.1 D20.1 D21.1 D22.1 D23.1 D24.1 D25.1 D26.1 D27.1 D28.1 D29.1 D30.1 D31.1 D32.1 D33.1 D34.1 D35.1 D36.1 D37.1 D38.1 D39.1 D40.1 D41.1 D42.1 D43.1 D44.1 D45.1 D46.1 D47.1 D48.1 D49.1 D50.1 U50.3 | length 629.8
  Bottom Layer w0.8: U50.3 -155.702,56.515 -159.766,60.579 -159.766,77.978 D41.1 -158.077,79.883 -158.617,80.423 -158.689,80.423 -159.861,81.595 -159.861,84.949 D42.1 -158.077,86.949 -158.617,87.489 -158.689,87.489 -159.861,88.66 -159.861,92.014 D43.1 -158.077,94.014 -158.617,94.554 -158.689,94.554 -159.861,95.726 -159.861,99.08 D44.1 -158.077,101.08 -158.617,101.62 -158.689,101.62 -159.861,102.791 -159.861,106.145 D45.1 -158.077,108.145 -158.617,108.685 -158.689,108.685 -159.861,109.857 -159.861,113.211 D46.1 -158.077,115.211 -158.617,115.751 -158.689,115.751 -159.861,116.922 -159.861,120.276 D47.1 -158.077,122.276 -158.617,122.816 -158.689,122.816 -159.861,123.988 -159.861,127.342 D48.1 -158.077,129.342 -158.617,129.882 -158.689,129.882 -159.861,131.053 -159.861,134.407 D49.1 -158.077,136.407 -158.617,136.947 -158.689,136.947 -159.861,138.119 -159.861,141.473 D50.1 -158.077,143.473 -158.617,144.013 -158.689,144.013 -160.401,145.725 -160.401,148.082 -157.734,150.749 -145.066,150.749 -138.043,143.727 -126.862,143.727 ; D31.1 -125.883,79.883 -126.423,80.423 -126.495,80.423 -127.667,81.595 -127.667,84.977 D32.1 -125.883,86.977 -126.423,87.517 -126.495,87.517 -127.667,88.688 -127.667,92.071 D33.1 -125.883,94.071 -126.423,94.611 -126.495,94.611 -127.667,95.782 -127.667,99.164 D34.1 -125.883,101.164 -126.423,101.704 -126.495,101.704 -127.667,102.876 -127.667,106.258 D35.1 -125.883,108.258 -126.423,108.798 -126.495,108.798 -127.667,109.97 -127.667,113.352 D36.1 -125.883,115.352 -126.423,115.892 -126.495,115.892 -127.667,117.063 -127.667,120.446 D37.1 -125.883,122.446 -126.423,122.986 -126.495,122.986 -127.667,124.157 -127.667,127.539 D38.1 -125.883,129.539 -126.423,130.079 -126.495,130.079 -127.667,131.251 -127.667,134.633 D39.1 -125.883,136.633 -126.423,137.173 -126.495,137.173 -127.667,138.345 -127.667,141.727 D40.1 -125.82,143.88 -126.862,143.88 -129.794,146.812 -129.794,148.59 -127.635,150.749 -111.125,150.749 -110.744,150.368 -105.119,144.743 -95.112,144.743 ; D21.1 -93.688,79.883 -94.228,80.423 -94.3,80.423 -95.472,81.595 -95.472,85.09 D22.1 -93.688,87.09 -94.228,87.63 -94.3,87.63 -95.472,88.801 -95.472,92.296 D23.1 -93.688,94.296 -94.228,94.836 -94.3,94.836 -95.472,96.008 -95.472,99.503 D24.1 -93.688,101.503 -94.228,102.043 -94.3,102.043 -95.472,103.215 -95.472,106.71 D25.1 -93.688,108.71 -94.228,109.25 -94.3,109.25 -95.472,110.421 -95.472,113.916 D26.1 -93.688,115.916 -94.228,116.456 -94.3,116.456 -95.472,117.628 -95.472,121.123 D27.1 -93.688,123.123 -94.228,123.663 -94.3,123.663 -95.472,124.835 -95.472,128.33 D28.1 -93.688,130.33 -94.228,130.87 -94.3,130.87 -95.472,132.041 -95.472,135.536 D29.1 -93.688,137.536 -94.228,138.076 -94.3,138.076 -95.472,139.248 -95.472,142.743 D30.1 -93.625,144.896 -95.112,144.896 -97.536,147.32 -97.536,149.733 -95.758,151.511 -82.042,151.511 -76.29,145.759 -62.346,145.759 D20.1 -63.278,143.759 -63.278,140.151 -62.106,138.979 -62.034,138.979 -61.494,138.439 D19.1 -63.278,136.439 -63.278,132.831 -62.106,131.66 -62.034,131.66 -61.494,131.12 D18.1 -63.278,129.12 -63.278,125.512 -62.106,124.34 -62.034,124.34 -61.494,123.8 D17.1 -63.278,121.8 -63.278,118.192 -62.106,117.021 -62.034,117.021 -61.494,116.481 D16.1 -63.278,114.481 -63.278,110.873 -62.106,109.701 -62.034,109.701 -61.494,109.161 D15.1 -63.278,107.161 -63.278,103.553 -62.106,102.382 -62.034,102.382 -61.494,101.842 D14.1 -63.278,99.842 -63.278,96.234 -62.106,95.062 -62.034,95.062 -61.494,94.522 D13.1 -63.278,92.522 -63.278,88.914 -62.106,87.743 -62.034,87.743 -61.494,87.203 D12.1 -63.278,85.203 -63.278,81.595 -62.106,80.423 -62.034,80.423 -61.494,79.883 D11.1 ; -62.346,145.912 -64.643,148.209 -64.643,149.606 -63.246,151.003 -49.657,151.003 -44.45,145.796 -44.069,145.796 -43.27,144.997 D10.1 -31.083,142.997 -31.083,139.474 -29.911,138.302 -29.839,138.302 -29.299,137.762 D9.1 -31.083,135.762 -31.083,132.239 -29.911,131.067 -29.839,131.067 -29.299,130.527 D8.1 -31.083,128.527 -31.083,125.004 -29.911,123.832 -29.839,123.832 -29.299,123.292 D7.1 -31.083,121.292 -31.083,117.769 -29.911,116.597 -29.839,116.597 -29.299,116.057 D6.1 -31.083,114.057 -31.083,110.534 -29.911,109.363 -29.839,109.363 -29.299,108.823 D5.1 -31.083,106.823 -31.083,103.299 -29.911,102.128 -29.839,102.128 -29.299,101.588 D4.1 -31.083,99.588 -31.083,96.064 -29.911,94.893 -29.839,94.893 -29.299,94.353 D3.1 -31.083,92.353 -31.083,88.829 -29.911,87.658 -29.839,87.658 -29.299,87.118 D2.1 -31.083,85.118 -31.083,81.595 -29.911,80.423 -29.839,80.423 -29.299,79.883 D1.1
VarResN1: B8.2 J5.13 | length 158.3
  Top Layer w0.8: v1(-77.589,39.172) -76.891,39.172 -74.637,41.426 v1(-61.182,41.426) ; v1(-51.125,33.315) -51.374,33.065 -51.374,24.323 -44.974,17.923 v1(-44.974,12.478)
  Bottom Layer w0.8: B8.2 -128.9,26.294 -124.587,30.607 -82.832,30.607 -77.617,35.822 -77.617,39.144 v1(-77.589,39.172) ; v1(-61.182,41.426) -60.666,40.909 -58.253,40.909 -51.125,33.782 v1(-51.125,33.315) ; v1(-44.974,12.478) -44.561,12.478 -30.353,26.686 J5.13
VarResN2: B9.2 J5.16 | length 118.9
  Top Layer w0.8: v1(-70.612,36.449) -61.909,36.449 -61.625,36.165 -47.542,36.165 -47.032,35.655 -26.725,35.655 v1(-26.495,35.885)
  Bottom Layer w0.8: B9.2 -116.957,22.489 -113.284,26.162 -79.883,26.162 -75.506,30.539 -75.506,31.555 v1(-70.612,36.449) ; J5.16 -27.65,32.548 -27.65,33.999 -26.495,35.154 v1(-26.495,35.885)
VarResN3: B10.2 J5.17 | length 118.1
  Top Layer w0.8: v1(-70.859,28.893) -51.594,9.628 -38.314,9.628 v1(-35.877,12.065)
  Bottom Layer w0.8: B10.2 -105.014,18.303 -100.584,22.733 -78.613,22.733 -75.533,25.813 -73.939,25.813 v1(-70.859,28.893) ; v1(-35.877,12.065) -25.273,22.669 J5.17
VarResN4: B11.2 J5.19 | length 108.2
  Top Layer w0.8: v1(-70.866,21.463) -70.866,20.772 -57.46,7.366 -36.036,7.366 v1(-31.337,12.065)
  Bottom Layer w0.8: B11.2 -93.071,17.633 -90.97,19.733 -77.37,19.733 -75.52,17.883 -72.764,17.883 -71.383,19.264 -71.383,20.946 v1(-70.866,21.463) ; v1(-31.337,12.065) -22.733,20.669 J5.19
VarResN5: B12.2 J5.18 | length 114.5
  Bottom Layer w0.8: B12.2 -81.128,5.003 -80.843,5.288 -80.843,5.39 -77.47,8.763 -30.607,8.763 -8.763,30.607 -8.763,39.116 -12.502,42.855 -15.494,42.855 -24.733,33.616 -24.733,33.155 -25.273,32.615 J5.18
VarResN6: B13.2 J5.20 | length 167.8
  Top Layer w0.8: v1(-84.836,39.116) -84.836,38.385 -83.44,36.99 -83.44,36.888 -82.875,36.322 -75.946,36.322 -72.969,39.299 -63.334,39.299 -62.54,38.505 -47.761,38.505 -46.411,37.155 -31.466,37.155 -29.886,38.735 -25.913,38.735 -24.77,39.878 v1(-14.224,39.878)
  Bottom Layer w0.8: B13.2 -140.843,21.971 -126.365,36.449 -86.907,36.449 -84.836,38.52 v1(-84.836,39.116) ; J5.20 -19.197,35.921 -18.054,35.921 -14.224,39.751 v1(-14.224,39.878)
VarResP1: B8.1 J5.1 | length 122.6
  Bottom Layer w0.8: B8.1 -131.44,26.675 -125.095,33.02 -85.471,33.02 -81.915,36.576 -81.915,38.876 -78.674,42.117 -65.904,42.117 -62.263,38.476 -57.941,38.476 -57.277,37.813 -57.277,34.29 -53.086,30.099 -51.562,30.099 -51.475,30.012 -45.76,30.012 J5.1
VarResP2: B9.1 J5.3 | length 107.7
  Bottom Layer w0.8: B9.1 -119.497,23.251 -114.935,27.813 -83.279,27.813 -71.793,39.299 -65.207,39.299 -53.213,27.305 -45.305,27.305 -44.765,27.845 -43.593,29.017 -43.593,29.075 -43.053,29.615 J5.3
VarResP3: B10.1 J5.5 | length 92.2
  Bottom Layer w0.8: B10.1 -107.554,18.781 -101.824,24.511 -79.413,24.511 -71.031,32.893 -62.103,32.893 -54.483,25.273 -44.45,25.273 -40.676,29.047 -40.676,29.682 J5.5
VarResP4: B11.1 J5.7 | length 77
  Bottom Layer w0.8: B11.1 -95.611,18.713 -93.091,21.233 -77.992,21.233 -74.912,24.313 -59.367,24.313 -58.827,23.773 -43.283,23.773 -38.136,28.92 -38.136,29.682 J5.7
VarResP5: B12.1 J5.9 | length 63.1
  Bottom Layer w0.8: B12.1 -83.668,9.169 -76.454,16.383 -50.165,16.383 -48.53,18.018 -43.906,18.018 -35.433,26.491 J5.9
VarResP6: B13.1 J5.11 | length 155
  Top Layer w0.8: v1(-90.551,39.299) -84.089,32.837 -69.889,32.837 -56.427,19.375 -53.426,16.374 v1(-49.53,12.478)
  Bottom Layer w0.8: B13.1 -143.383,12.055 -143.256,12.182 -143.256,22.352 -126.619,38.989 -90.861,38.989 v1(-90.551,39.299) ; v1(-49.53,12.478) -49.117,12.478 -45.077,16.518 -43.285,16.518 -32.893,26.91 J5.11
pads on no net: B8.3 B9.3 B10.3 B11.3 B12.3 B13.3 R53.3 R55.3 R57.3 R59.3 R61.3 U50.
copper on no net:
  other v2: -172.466,6.223 -9.398,6.223 -172.466,146.177 -8.89,146.177

## Text inside footprints (layer, text, board x,y; h text height)
U50: Mechanical 13 "3" at -162.052,36.195 h1.27 r90; Mechanical 13 "2" at -162.052,33.654 h1.27 r90; Mechanical 13 "1" at -162.052,31.109 h1.27 r90